# Altium PCB YingHuoCtrl.PcbDoc
Units mil, origin at the board's own origin, x right, y up, seen from the top; angles counter-clockwise.
Board outline 1575 x 1574.8 mil, 2 copper layers (Top Layer, Bottom Layer), stack 65.792 mil thick; 54 components, 62 nets, 237 pads, 64 vias.
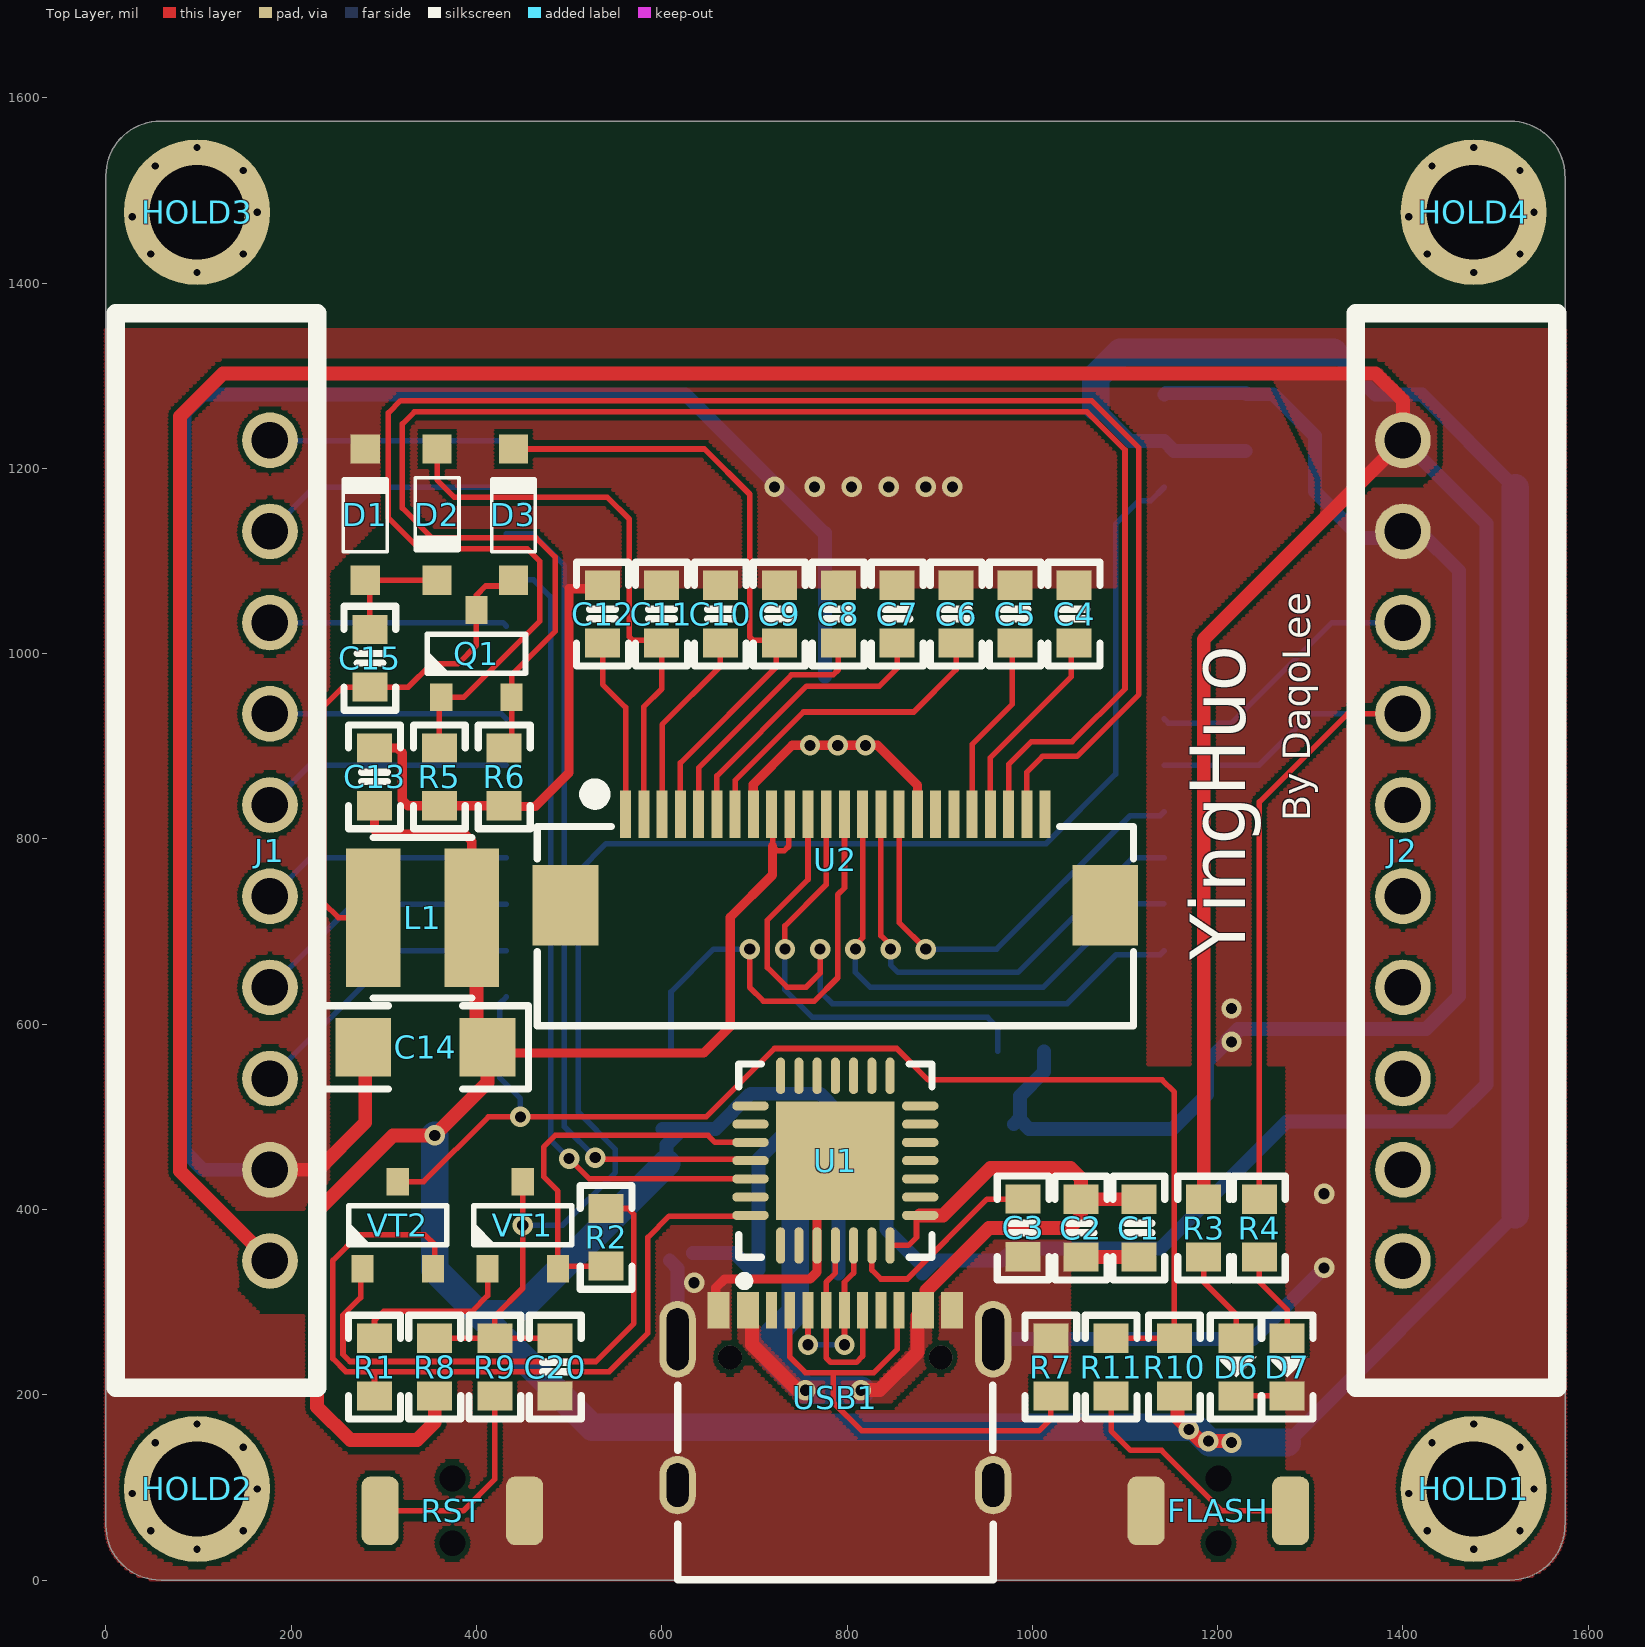
[diagram p0: Top Layer view]
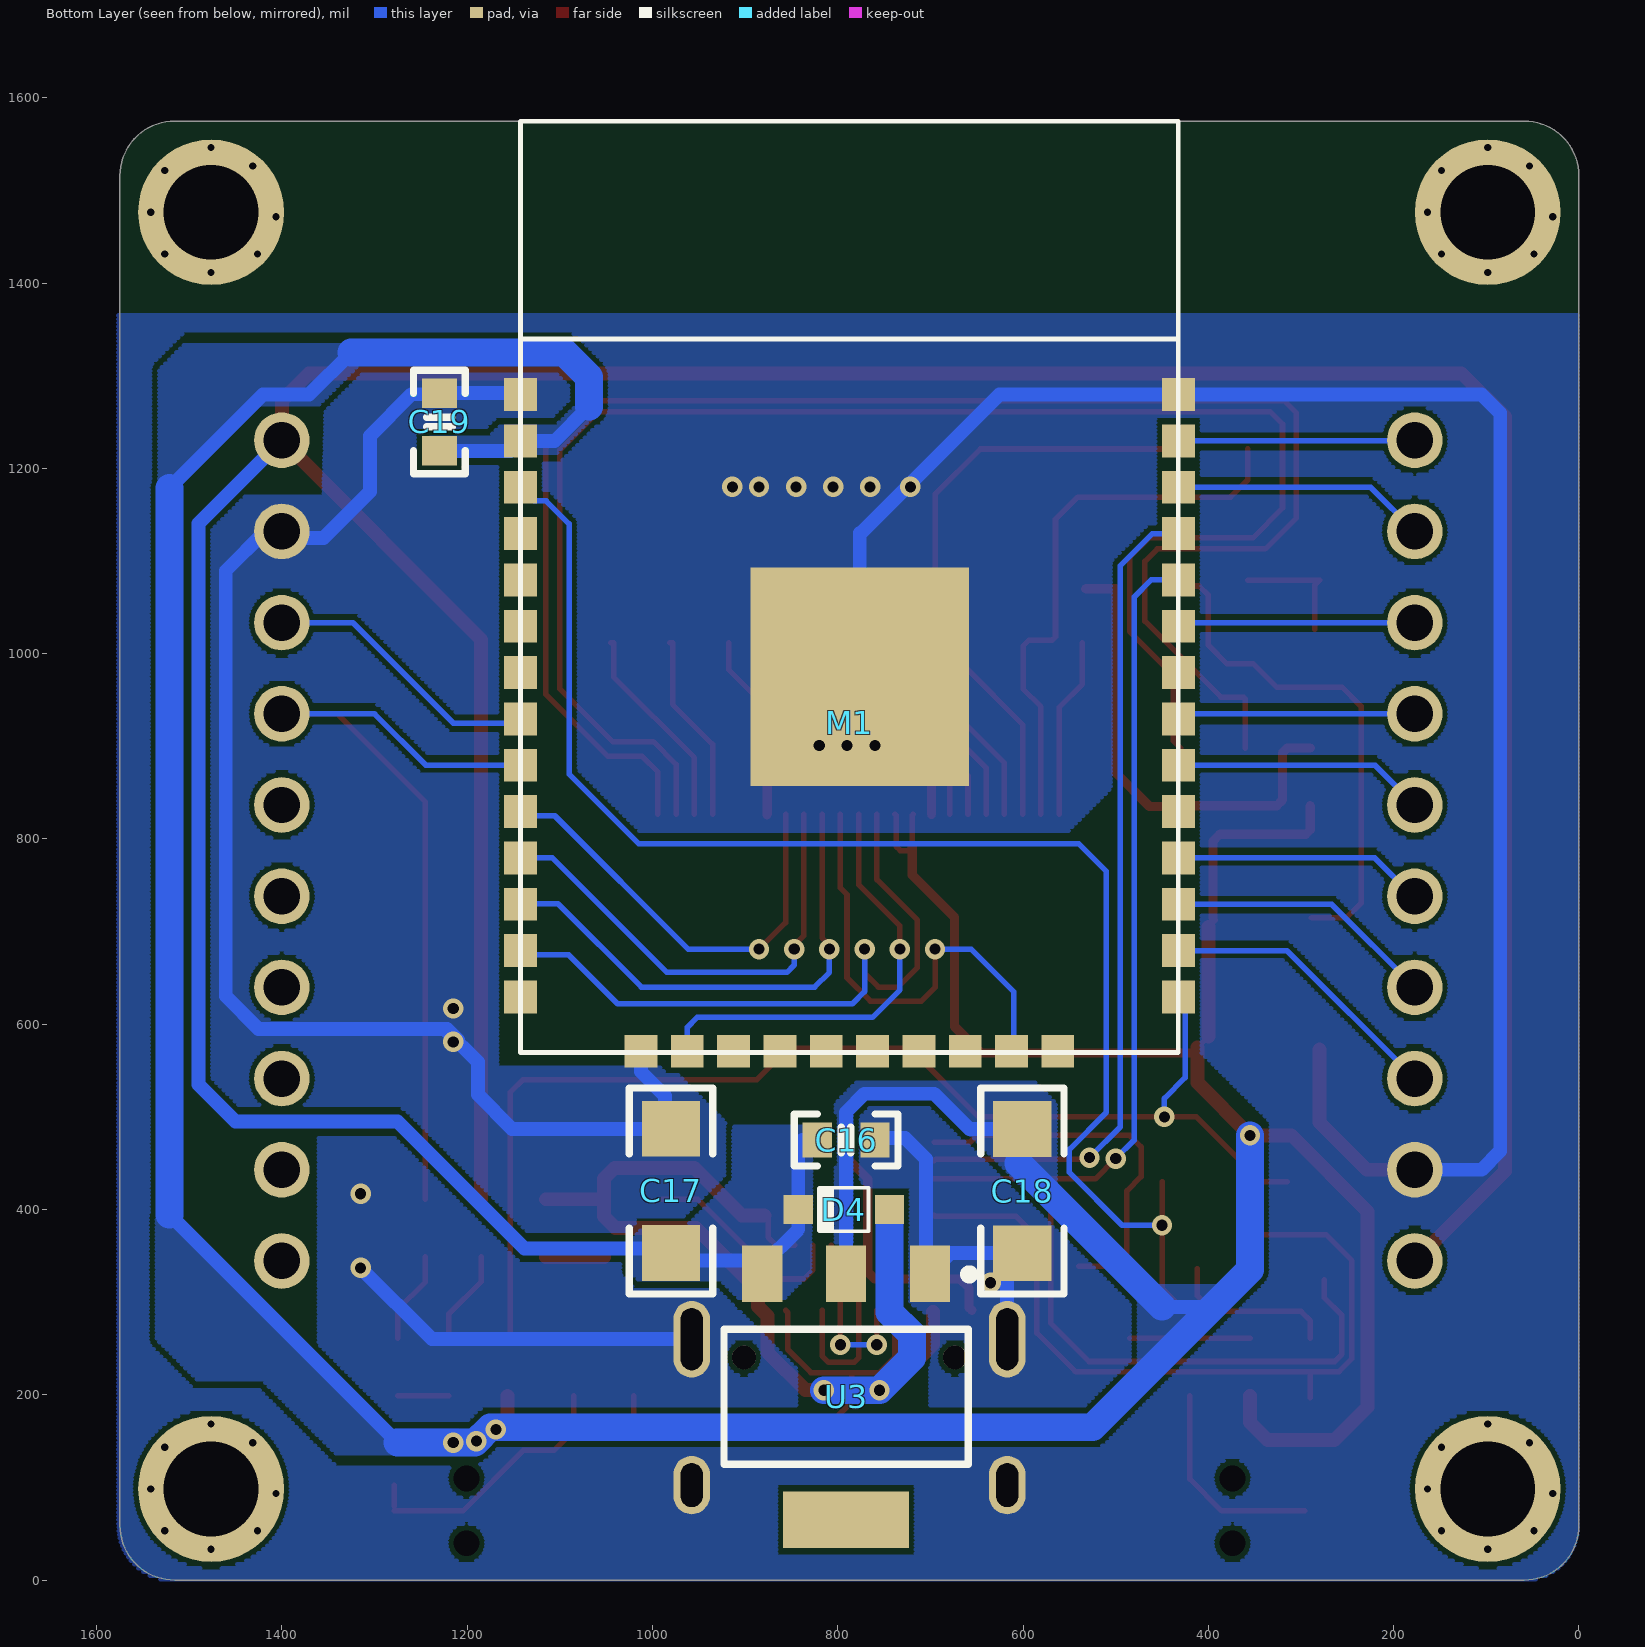
[diagram p1: Bottom Layer view, seen from below]
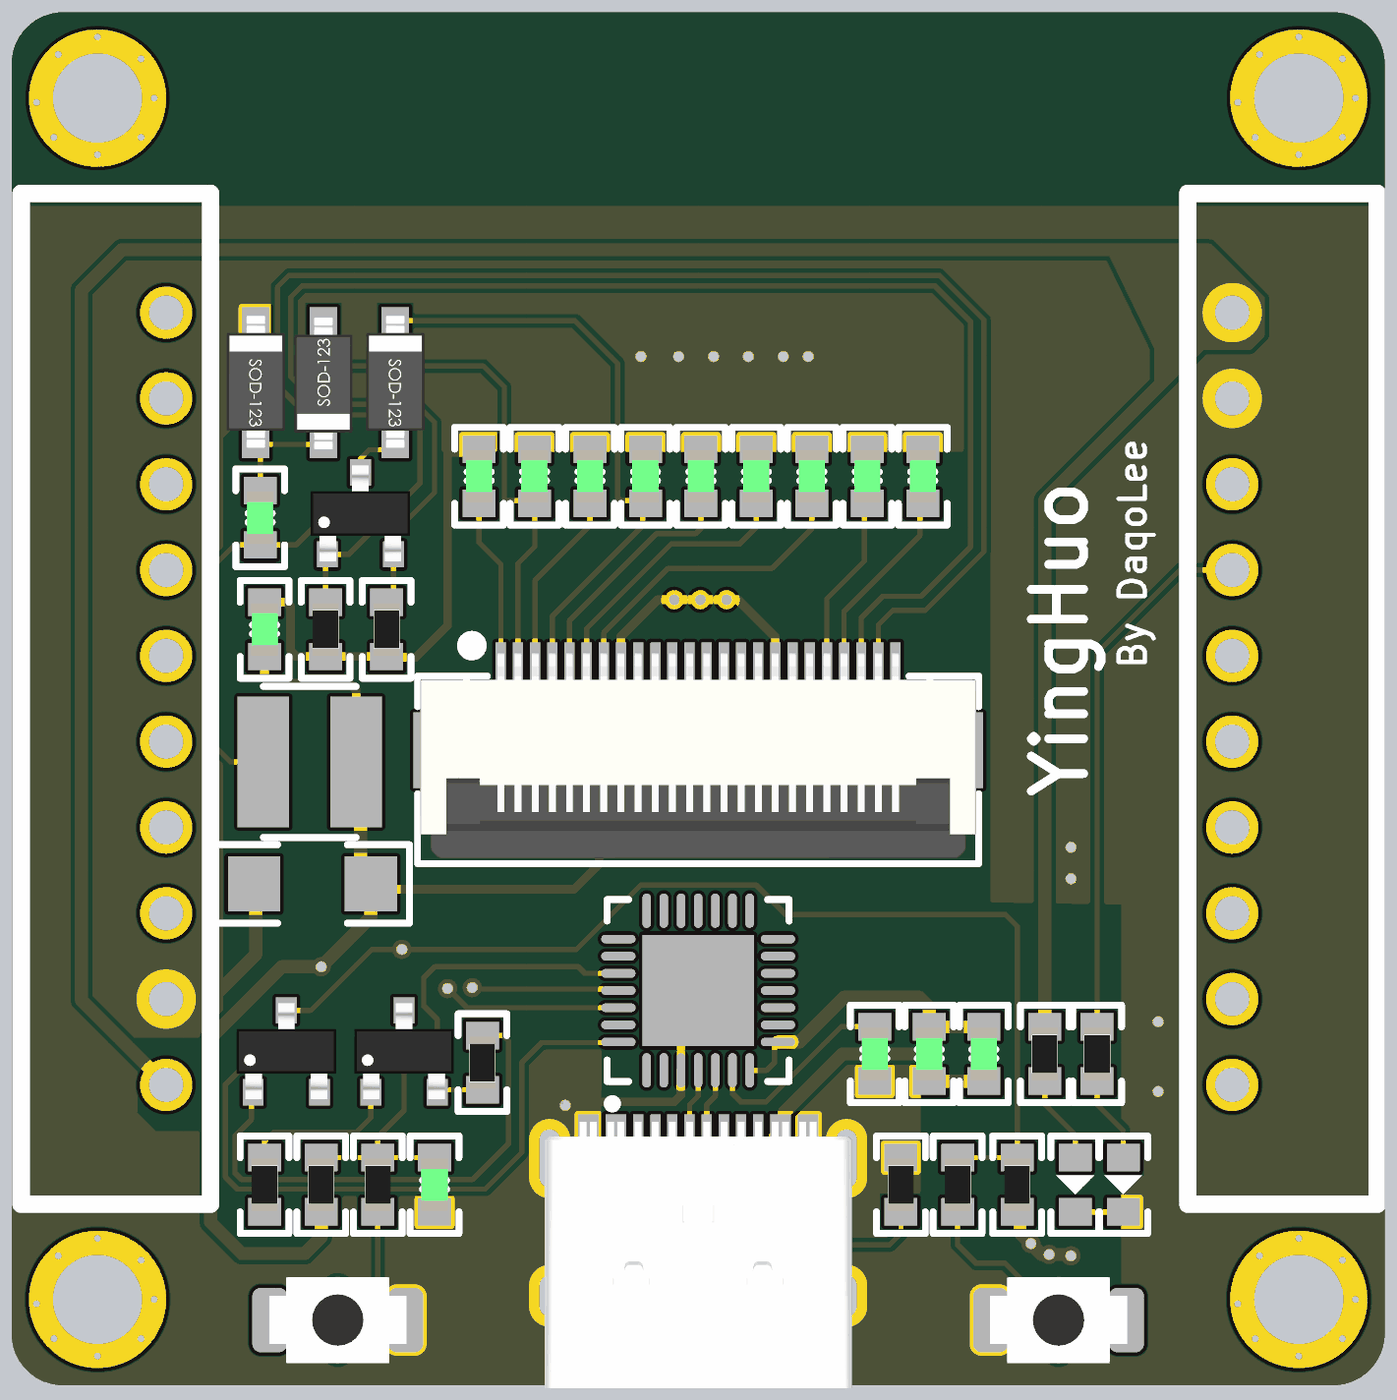
[diagram p2: 3D render of the assembled board from above, using the file's embedded part models]
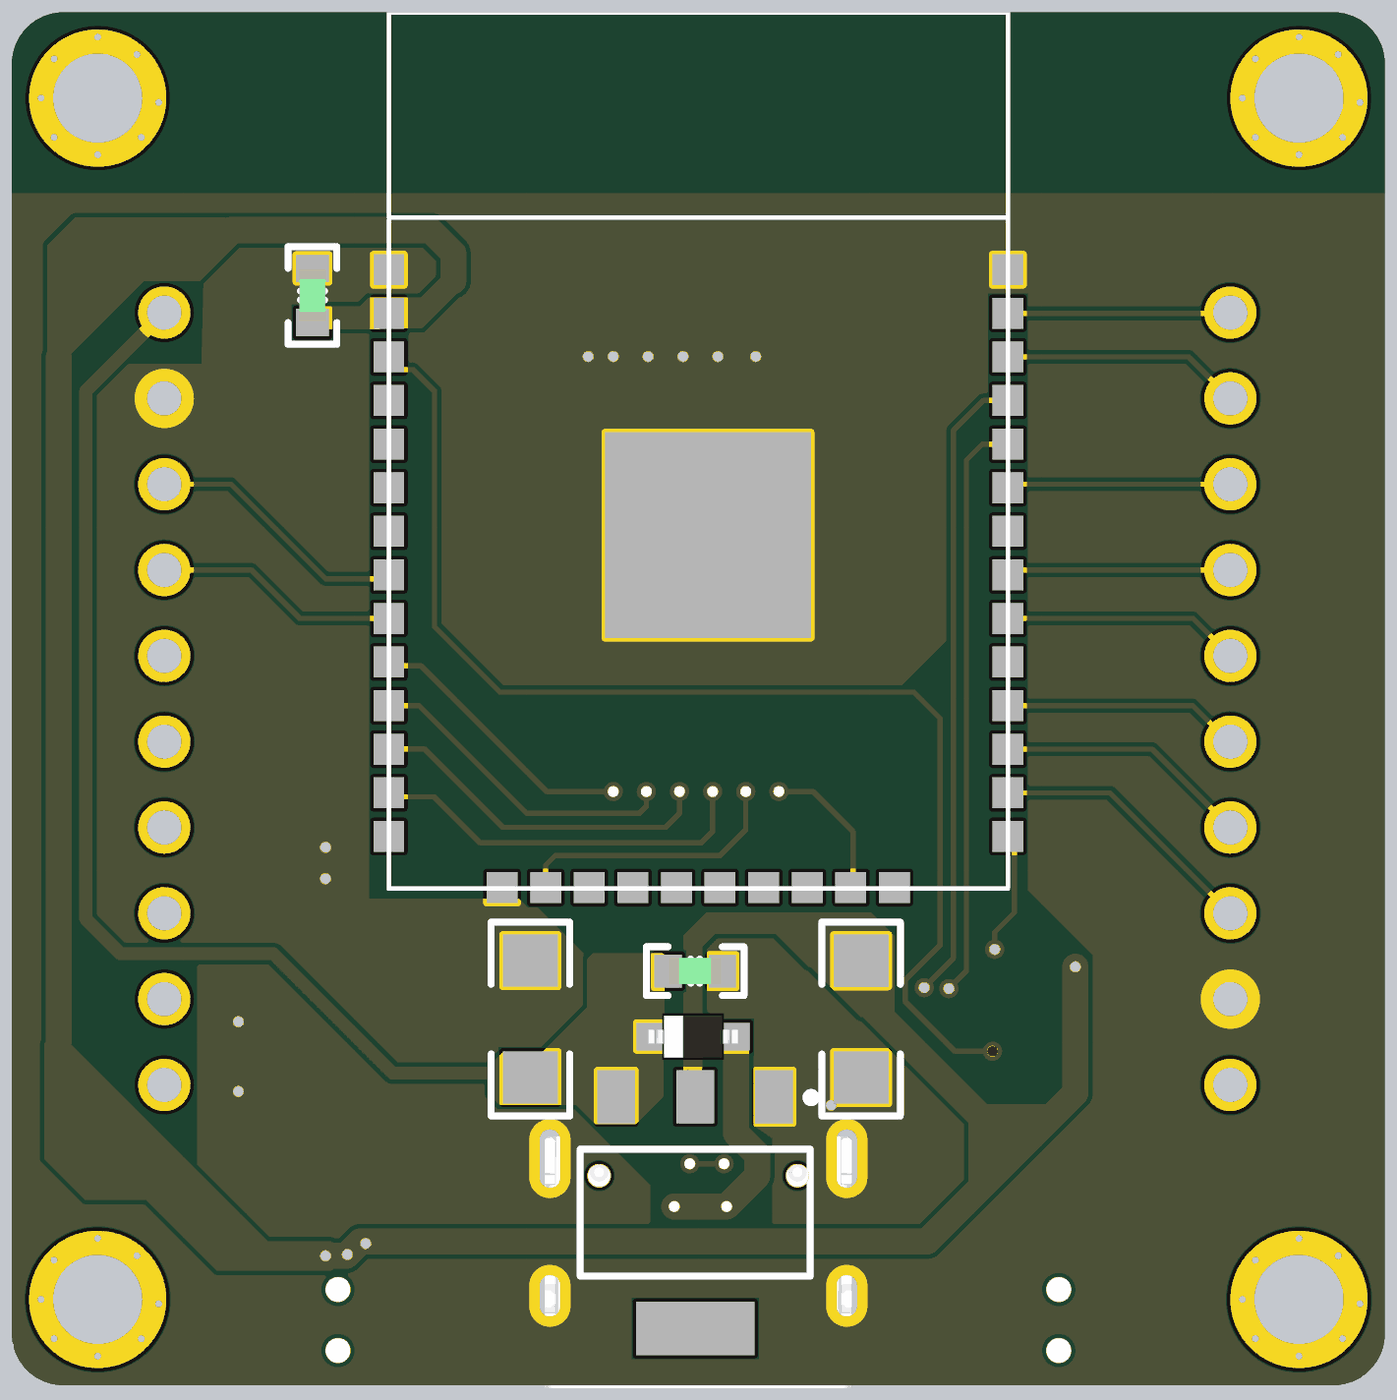
[diagram p3: 3D render of the assembled board from below, using the file's embedded part models]

## Layer stack, top to bottom
Top Solder: solder mask 0.4, Solder Resist, Dk 3.5
Top Layer: signal copper 1.4
Dielectric 1: dielectric 62.9921, FR-4, Dk 4.8
Bottom Layer: signal copper 1.4
Bottom Solder: solder mask 0.4, Solder Resist, Dk 3.5

## Board outline
0,59.06 0,1515.75 cw(c59.06,1515.75) 59.06,1574.8 1515.75,1574.8 cw(c1515.75,1515.75) 1574.8,1515.75 1575,1515 1575,59.25 1574.8,59.06 cw(c1515.75,59.06) 1515.75,0 59.06,0 cw(c59.06,59.06)

## Design rules (kind name [scope] priority, off if disabled: settings)
Clearance [All] p1: gap=5 ignorepadtopadclearanceinfootprint=FALSE
PlaneClearance [All] p1: clearance=5
PlaneConnect [All] p1: planeconnectstyle=Direct reliefexpansion=20 reliefentries=4 reliefconductorwidth=10 reliefairgap=10
PolygonConnect [All] p1: connectstyle=Direct reliefconductorwidth=10 reliefentries=4 polygonreliefangle="90 Angle" airgapwidth=10
RoutingVias [All] p1: holewidth=12 width=22 viastyle="Through Hole" minholewidth=12 minwidth=22 maxholewidth=12 maxwidth=22
SilkToSolderMaskClearance [IsPad] p1: minsilkscreentomaskgap=2 clearancetoexposedcopper=TRUE
SolderMaskExpansion [All] p1: expansion=4
Width Width_1 [InNetClass('PWR')] p1: maxlimit=15 minlimit=15 preferedwidth=15
Width [All] p2: maxlimit=31.5 minlimit=4 preferedwidth=6
27 further rules are at their usual default settings.

## Components (designator, comment, footprint, x,y, rotation, side; value= is the part's Value field where it differs from the comment)
C1 "10uF" CAP-0603 1115,380 r90 top
C2 "104" CAP-0603 1052.5,380 r90 top
C3 "1uF" CAP-0603 990,380.12 r270 top
C4 "1uF" CAP-0603 1045,1042.64 r90 top
C5 "1uF" CAP-0603 981.39,1042.64 r90 top
C6 "1uF" CAP-0603 917.78,1042.64 r90 top
C7 "1uF" CAP-0603 854.17,1042.64 r90 top
C8 "1uF" CAP-0603 790.56,1042.64 r270 top
C9 "1uF" CAP-0603 726.94,1042.64 r270 top
C10 "1uF" CAP-0603 663.33,1042.64 r270 top
C11 "1uF" CAP-0603 599.72,1042.64 r270 top
C12 "1uF" CAP-0603 536.11,1042.64 r270 top
C13 "104" CAP-0603 290,867 r90 top
C14 "475" CAP-1206 345,575 r0 top
C15 "104" CAP-0603 285,995 r90 top
C16 "10uF" CAP-0603 791,475 r0 bottom
C17 "104" CAP-1206 980,420 r270 bottom
C18 "10uF" CAP-1206 600.71,420 r90 bottom
C19 "104" CAP-0603 1230,1250 r90 bottom
C20 "104" CAP-0603 485,230 r90 top
D1 "MBR0350" SOD_123 280,1150 r270 top
D2 "MBR0350" SOD_123 357.5,1150 r90 top
D3 "MBR0350" SOD_123 440,1150 r270 top
D4 "B5819WS" SOD_323 793.4,400 r180 bottom
D6 "LED" LED-0603 1220,230 r270 top
D7 "LED" LED-0603 1275,230 r270 top
FLASH "按键" KEY_2S 1200.79,74.8 r0 top
HOLD1 "M2.5" Hold_M2.5S 1476.38,98.43 r0 top
HOLD2 "M2.5" Hold_M2.5S 98.43,98.43 r0 top
HOLD3 "M2.5" Hold_M2.5S 98.43,1476.38 r0 top
HOLD4 "M2.5" Hold_M2.5S 1476.38,1476.38 r0 top
J1 "J" JL-B01F-10 177.17,787.4 r90 top
J2 "J" JL-B01F-10 1400,787.4 r270 top
L1 "68uH" L-SMD-3D16 395,715 r180 top
M1 "ESP32S_Module" ESP32S 787.4,925.2 r180 bottom
Q1 "Si1308EDL" SOT-23-3 400,1000 r270 top
R1 "12K" R-0603 290,230 r270 top
R2 "12K" R-0603 540,370 r90 top
R3 "1K" R-0603 1185,380 r270 top
R4 "470R" R-0603 1245,380 r270 top
R5 "10K" R-0603 360,867 r90 top
R6 "3R" R-0603 430,867 r270 top
R7 "5.1K" R-0603 1020,230 r90 top
R8 "1K" R-0603 355,230 r270 top
R9 "470" R-0603 420,230 r90 top
R10 "1K" R-0603 1153.33,230 r270 top
R11 "470" R-0603 1085,230 r90 top
RST "按键" KEY_2S 374.02,74.8 r180 top
U1 "CP2102" QFN50P500X500X80_HS-29N 787.4,452.76 r90 top value=Value
U2 "PFC24" "FPC0.5 2H-WS-24P" 787.4,728.35 r0 top
U3 "LM1117-3.3V" SOT-223 815,205 r0 bottom
USB1 "Type-C" Type-C 787.4,196.85 r270 top
VT1 "S8050" SOT-23-3 450,383.06 r270 top
VT2 "S8050" SOT-23-3 315,383.06 r270 top

## Footprints (in the part's own frame and the unit in brackets; to place one, negate y for a bottom-side part, rotate by r counter-clockwise, add the part's x,y. Pads: shape width x height; smd on the part's side, far side on the other; paste and mask are expansions set on the pad)
CAP-0603 [mm]
  rect 0.8x0.96 smd: 1(-0.79,0) 2(0.79,0)
  silkscreen extent -1.42,-0.71 1.42,0.71, body extent -0.76,-0.39 0.76,0.39, height 0.9
CAP-1206 [mm] "贴片元件"
  rect 1.524x1.6 smd: 1(-1.703,0) 2(1.7,0)
  silkscreen extent -2.83,-1.14 2.83,1.14, body extent -1.91,-0.89 1.91,0.89, height 1
ESP32S [mm] "ESP32S-Module"
  rect 0.9x0.9 smd: 1(-9.017,9) 2(-9.017,7.73) 3(-9.017,6.46) 4(-9.017,5.19) 5(-9.017,3.92) 6(-9.017,2.65) 7(-9.017,1.38) 8(-9.017,0.11) 9(-9.017,-1.16) 10(-9.017,-2.43) 11(-9.017,-3.7) 12(-9.017,-4.97) 13(-9.017,-6.24) 14(-9.017,-7.51) 15(-5.717,-9) 16(-4.447,-9) 17(-3.177,-9) 18(-1.907,-9) 19(-0.637,-9) 20(0.633,-9) 21(1.903,-9) 22(3.173,-9) 23(4.443,-9) 24(5.713,-9) 25(9.017,-7.51) 26(9.017,-6.24) 27(9.017,-4.97) 28(9.017,-3.7) 29(9.017,-2.43) 30(9.017,-1.16) 31(9.017,0.11) 32(9.017,1.38) 33(9.017,2.65) 34(9.017,3.92) 35(9.017,5.19) 36(9.017,6.46) 37(9.017,7.73) 38(9.017,9)
  rect 6x6 smd: 101(0.283,1.266)
  silkscreen extent -9.02,-9.03 9.02,16.49, body extent -9.02,-9.03 9.02,16.49, height 2
"FPC0.5 2H-WS-24P" [mm] "长：16.2mm，宽：5.2mm，高：2mm"
  rect 1.8x2.2 smd: 0(-7.4,0) 0(7.4,0)
  rect 0.3x1.3 smd: 1(5.75,2.497) 2(5.25,2.497) 3(4.75,2.497) 4(4.25,2.497) 5(3.75,2.497) 6(3.25,2.497) 7(2.75,2.497) 8(2.25,2.497) 9(1.75,2.497) 10(1.25,2.497) 11(0.75,2.497) 12(0.25,2.497) 13(-0.25,2.497) 14(-0.75,2.497) 15(-1.25,2.497) 16(-1.75,2.497) 17(-2.25,2.497) 18(-2.75,2.497) 19(-3.25,2.497) 20(-3.75,2.497) 21(-4.25,2.497) 22(-4.75,2.497) 23(-5.25,2.497) 24(-5.75,2.497)
  silkscreen extent -8.18,-3.3 8.18,3.23, body extent -8.1,-3.15 8.1,2.85, height 2
Hold_M2.5S [mm]
  round 4 hole 2.6: 0(0,0)
JL-B01F-10 [mil]
  round 60 hole 39.37: 1(-442.91,0) 2(-344.49,0) 3(-246.06,0) 4(-147.64,0) 5(-49.21,0) 6(49.21,0) 7(147.64,0) 8(246.06,0) 9(344.49,0) 10(442.91,0)
  silkscreen extent -580,-51 580,166, body extent -522,-6 522,250, height 216
KEY_2S [mil]
  round 0 hole 28: 0(0,-35) 0(0,35)
  rrect50% 40x74 smd: 1(-78,0) 2(78,0)
  body extent -79,-49 79,49, height 63
L-SMD-3D16 [mm] "贴片电感4x4"
  rect 1.5x3.8 smd: 1(0,0) 2(2.7,0)
  silkscreen extent 0,-2.2 2.7,2.2, body extent -0.5,-1.85 3.2,1.85, height 2
LED-0603 [mm]
  rect 0.8x0.96 smd: 1(-0.79,0) 2(0.79,0)
  silkscreen extent -1.42,-0.71 1.42,0.71, body extent -0.81,-0.4 0.81,0.4, height 0.6
QFN50P500X500X80_HS-29N [mm] "QFN, 28-Leads, Body 5.00x5.00mm, Pitch 0.50mm, Thermal Pad 3.25x3.25mm, IPC Medium Density"
  oval 1x0.25 smd: 1(-2.325,1.5) 2(-2.325,1) 3(-2.325,0.5) 4(-2.325,0) 5(-2.325,-0.5) 6(-2.325,-1) 7(-2.325,-1.5) 15(2.325,-1.5) 16(2.325,-1) 17(2.325,-0.5) 18(2.325,0) 19(2.325,0.5) 20(2.325,1) 21(2.325,1.5)
  oval 0.25x1 smd: 8(-1.5,-2.325) 9(-1,-2.325) 10(-0.5,-2.325) 11(0,-2.325) 12(0.5,-2.325) 13(1,-2.325) 14(1.5,-2.325) 22(1.5,2.325) 23(1,2.325) 24(0.5,2.325) 25(0,2.325) 26(-0.5,2.325) 27(-1,2.325) 28(-1.5,2.325)
  rect 3.25x3.25 smd: 29(0,0)
  silkscreen extent -3.42,-2.65 2.65,2.65, body extent -2.5,-2.5 2.5,2.5, height 0.8
R-0603 [mm]
  rect 0.8x0.96 smd: 1(-0.79,0) 2(0.79,0)
  silkscreen extent -1.42,-0.71 1.42,0.71, body extent -0.76,-0.38 0.76,0.38, height 0.41
SOD_123 [mm]
  rect 0.8x0.8 smd: 1(1.8,0) 2(-1.8,0)
  silkscreen extent -1.02,-0.6 1.02,0.6, body extent -1.95,-0.85 1.9,0.85, height 1.42
SOD_323 [mm]
  rect 0.8x0.8 smd: 1(1.25,0) 2(-1.25,0)
  silkscreen extent -0.72,-0.6 0.67,0.6, body extent -1.3,-0.68 1.3,0.67, height 1.1
SOT-23-3 [mil] "贴片MOS管"
  rect 30x24 smd: 1(47,-38) 2(47,38) 3(-47,0)
  silkscreen extent -21,-53 21,53, body extent -55,-57 55,57, height 51
SOT-223 [mm]
  rect 1.1x1.55 smd: 1(-2.91,-3.197) 2(-0.61,-3.197) 3(1.69,-3.197)
  rect 3.45x1.55 smd: 4(-0.61,3.553)
  silkscreen extent -4.11,-3.3 2.74,2.03, body extent -3.88,-3.38 2.62,3.58, height 1.7
Type-C [mm]
  round 0.65 hole 0.65: 0(-1.105,2.89) 0(-1.105,-2.89)
  oval 1.6x1 hole 0.6 slot 1.2 at 0 deg: 1(2.395,4.325) 2(2.395,-4.325)
  oval 2.1x1 hole 0.6 slot 1.7 at 0 deg: 3(-1.605,-4.325) 4(-1.605,4.325)
  rect 1x0.3 smd: A1(-2.395,-3.35) A4(-2.395,-2.55) A5(-2.395,-1.25) A6(-2.395,-0.25) A7(-2.395,0.25) A8(-2.395,1.25) A9(-2.395,2.55) A12(-2.395,3.35) B1(-2.395,3.05) B4(-2.395,2.25) B5(-2.395,1.75) B6(-2.395,0.75) B7(-2.395,-0.75) B8(-2.395,-1.75) B9(-2.395,-2.25) B12(-2.395,-3.05)
  silkscreen extent -0.34,-4.33 4.99,4.33, body extent -2.67,-4.48 5.08,4.48, height 3.26

## Part data
C1 C2 C3 C4 C5 C6 C7 C8 C9 C10 C11 C12 C13 C14 C15 C16 C17 C18 C19 C20: library part CAP
D1 D2 D3 D4: library part TVS
HOLD1 HOLD2 HOLD3 HOLD4: library part Hold_M3
J1 J2: library part HDR1x10
L1: library part Inductor, "电感"
M1: "Esp-32S", Datasheet=https://espressif.com/sites/default/files/documentation/esp_wroom_32_datasheet_en.pdf
Q1: library part MOS-N
R1 R2 R3 R4 R5 R6 R7 R8 R9 R10 R11: library part Res
U1: "Imported", MFG #1="SILICON LABS", PART DESC="SINGLE-CHIP USB TO UART BRIDGE, QFN28, RoHS.", PART NUMBER=CP2102, RefDes=RefDes, Type=DEV
VT1 VT2: library part BJT_NPN, "Transistor"

## Via types
v1: diameter 15.75, hole 7.87, Top Layer to Bottom Layer, tented both sides, 32 vias
v2: diameter 22, hole 12, Top Layer to Bottom Layer, tented both sides, 29 vias
v3: diameter 22, hole 12, Top Layer to Bottom Layer, 3 vias

## Nets (pads, with @x,y where several pads share a name; then routed paths per layer and width w, separated by ;. In a path a pad name is that pad's centre, name@x,y a point inside that pad or via, vN(x,y) a via of type N, cw(c..) or ccw(c..) an arc to the next point about the centre after c; other vN are vias at no path point)
3V3: C13.1 C14.2 C18.2 C19.1 L1.1 M1.2 R8.2 R10.2 U2.15 U2.16 U3.2 | length 5424.6
  Top Layer w6: L1.1@392.5,712.5 L1.1@400,705 ; C14.2@400,586.93 C14.2 ; U2.16 719.67,825.49 719.67,792.06 724.33,787.4 732.4,787.4 737.06,792.06 737.06,825.53 U2.15
  Top Layer w10: C13.1 290,810 295,805 387.6,805 395,797.6 L1.1 ; C14.2@410,569 411.93,569 645.4,569 674,597.6 674,715.46 719.67,761.13 719.67,792.06
  Top Layer w15: R8.2 355,170 336.06,151.06 263.94,151.06 228.03,186.97 228.03,398.03 310,480 v2(355,480) 411.93,536.93 411.93,569 C14.2 ; C14.2@400,586.93 L1.1@400,705 ; R10.2@1156.48,198.9 1156.48,175.06 1181.54,150 v2(1190,150) v2@1215,150
  Bottom Layer w6: v2(1169.01,162.53) 1181.54,150 v2(1190,150)
  Bottom Layer w15: 395,295 450,295 ; C18.2 C18.2@622.48,486.93 ; 605,450 605,469.45 C18.2@622.48,486.93 ; U3.2 791,505 771,525 696.03,525 657.96,486.93 C18.2@622.48,486.93 ; 1068.5,1266.5 1105.47,1229.53 M1.2 1153.03,1218.9 C19.1 ; v2(1190,150) v2@1191.57,148.43 ; 1275.17,148.43 1521.14,394.39 ; 1325,1325 1370.47,1279.53 1420.47,1279.53 1521.14,1178.86
  Bottom Layer w30: v2(355,480) 355,335 395,295 525,165 v2@1169.01,165 ; 450,295 605,450 ; 1068.5,1266.5 1068.5,1298.5 1095,1325 1325,1325 ; v2@1191.57,148.43 v2(1215,148.43) 1275.17,148.43 ; 1521.14,394.39 1521.14,1178.86
#EN: C20.2 M1.3 R8.1 R9.2 VT1.3 | length 1738.8
  Top Layer w6: R8.1 R9.2 ; VT1.3 v2(450,383.06) 450,315 420,285 R9.2 ; C20.2 R9.2
  Bottom Layer w6: v2(450,383.06) 493.06,383.06 550,440 550,465 510,505 510,765 540,795 1015,795 1090,870 1090,1140 1114.81,1164.81 1127.69,1164.81 M1.3
CC: R7.1 USB1.A5 USB1.B5 | length 536.7
  Top Layer w6: USB1.A5 738.19,240.81 755,224 785,224 ; USB1.B5 854,288.84 854,249 829,224 785,224 ; R7.1 1020,174 1007,161 816,161 785,192 785,224
CLK: M1.20
CMD: M1.19
DTR: R1.2 U1.28 VT2.2 | length 876.8
  Top Layer w6: R1.2@290,197 R1.2 290,225 ; VT2.2@361.02,335.04 355,341.06 355,362.06 344.06,373 273.02,373 245,344.98 245,239 259,225 290,225 ; U1.28 695.1,392.9 607.9,392.9 585,370 585,266.63 543.37,225 290,225
GDR: Q1.1 R5.2 U2.2 | length 1860.8
  Top Layer w6: R5.2 360,951 Q1.1 386.49,953 468.5,1035.01 468.5,1099.5 455,1113 338.36,1113 305,1146.36 305,1259.85 318.15,1273 1064,1273 1115,1222 1115,956 1048,889 1011,889 994.09,872.09 U2.2
GND: C1.1 C2.1 C3.2 C4.2 C5.2 C6.2 C7.2 C8.1 C9.1 C10.1 C11.1 C12.1 C13.2 C14.1 C16.1 C17.1 C18.1 C19.2 C20.1 D1.2 D6.2 D7.2 FLASH.1 J1.2 J2.2 M1.1 M1.15 M1.38 M1.101 R5.1 R6.2 R7.2 RST.1 U1.3 U1.29 U2.8 U2.17 U3.1 USB1.1 USB1.2 USB1.3 USB1.4 USB1.A1 USB1.A12 USB1.B1 USB1.B12 | length 5547.1
  Top Layer w6: C14.1 C14.1@280,572.95 ; D6.2 D7.2
  Top Layer w10: C13.2 314.9,898.1 320,893 320,842 326.1,835.9 R5.1 R6.2 430.9,835 463.5,835 500,871.5 500,1070 C12.1@532.37,1070 ; USB1.A1 658.42,294.05 658.42,315.42 668,325 760,325 767.54,332.54 767.54,361.04 U1.3 767.72,433.07 U1.29 ; U2.17 698.82,858.82 741,901 v3(760,901) v3(790,901) v3(820,901) 832.83,901 875.98,857.85 U2.8 U2.8@876.49,826.15
  Top Layer w15: J1.2 228.91,442.91 280,494 C14.1@280,572.95 ; C2.1 C1.1
  Bottom Layer w15: J1.2 105.09,442.91 85,463 85,1259.53 105,1279.53 M1.38 625.55,1279.53 775,1130.08 776.26,1130.08 M1.101 ; C18.1@608.66,345 617.13,336.54 USB1.3 ; USB1.2@617.13,96.37 USB1.2 ; 633.54,352.95 678.37,352.95 U3.1 704.64,335.06 704.64,454.43 727.21,477 C16.1@755,477 ; USB1.4@966.56,268.92 USB1.4 957.68,256.26 968.93,245 968.93,260.04 1238.04,260.04 v2(1315,337) ; C17.1@980,492.05 985,497.05 C17.1@986.5,497.05 ; M1.15 1012.48,548.7 986.5,522.72 C17.1@986.5,497.05 ; M1.1 1143.98,1281.1 C19.2 1231.1,1280 1260,1280 1305,1235 1305,1175 1355,1125 1393.11,1125 J2.2 1418.11,1131.89 1460.55,1089.45 1460.55,630.55 1425,595 1221.96,595 ; v2@1210,581 1210,583.04 1221.96,595 ; C17.1@986.5,497.05 996.5,487.05 1151.5,487.05 1188.5,524.05 1188.5,559.17 1223.15,593.81 1221.96,595
  other v2: 635,321 1315,417 1215,581 1215,617 721.67,1180 765,1180 805,1180 845,1180 885,1180 913.7,1180
IO0: M1.25 R10.1 R11.2 VT2.3 | length 1393.2
  Top Layer w6: VT2.3 343.06,430.06 413,500 v2(447.49,500) 647.91,500 721.73,573.82 853.66,573.82 887.48,540 1140,540 1153.33,526.67 R10.1 R11.2
  Bottom Layer w6: M1.25 425,622.13 425,542.33 447.49,519.84 v2(447.49,500)
IO2: M1.24
IO4: J1.3 M1.26 | length 312.5
  Bottom Layer w6: J1.3 315.35,679.53 M1.26
IO5: M1.29
IO12: M1.14
IO13: M1.16 U2.13 | length 480.1
  Top Layer w6: v2(733,681) 733,706.19 777.56,750.75 U2.13
  Bottom Layer w6: v2(733,681) 733,637 762.59,607.41 951.76,607.41 962.48,596.68 M1.16
IO14: M1.13 U2.14 | length 728.1
  Top Layer w6: U2.14 757.87,756.22 714,712.35 714,661 735,640 756,640 771,655 v2(771,681)
  Bottom Layer w6: v2(771,681) 771,635.31 784.19,622.13 1037.6,622.13 1090.47,675 1137.87,675 M1.13
IO15: M1.23 U2.12 | length 501.5
  Top Layer w6: v2(695,681) 695,639.76 709.76,625 764.82,625 790,650.18 790,739.86 797.24,747.11 U2.12
  Bottom Layer w6: M1.23 610,573.35 610,635 656,681 v2(695,681)
IO16: J1.4 M1.27 | length 292.4
  Bottom Layer w6: J1.4 266.93,729.53 M1.27
IO17: J1.5 M1.28 | length 272.4
  Bottom Layer w6: J1.5 179.08,738.19 220.41,779.53 M1.28
IO18: J1.6 M1.30 | length 273
  Bottom Layer w6: J1.6 220.08,879.53 M1.30
IO19: J1.7 M1.31 | length 257.5
  Bottom Layer w6: J1.7 426.89,935.04 M1.31
IO21: J1.8 M1.33 | length 256.9
  Bottom Layer w6: J1.8 428.46,1033.46 M1.33
IO22: J1.9 M1.36 | length 275
  Bottom Layer w6: J1.9 224.8,1179.53 M1.36
IO23: J1.10 M1.37 | length 255.6
  Bottom Layer w6: J1.10 177.95,1229.53 M1.37
IO25: M1.10 U2.9 | length 476.5
  Top Layer w6: U2.9 856.3,709.7 v2(885,681)
  Bottom Layer w6: v2(885,681) 961.47,681 1105.47,825 1137.87,825 M1.10
IO26: M1.11 U2.10 | length 516.8
  Top Layer w6: U2.10 836.61,695.72 847,685.33 v2(847,681)
  Bottom Layer w6: v2(847,681) 847,664 855,656 984.5,656 1108.02,779.53 M1.11
IO27: M1.12 U2.11 | length 550.8
  Top Layer w6: v2(809,681) 809,685.33 816.93,693.26 U2.11
  Bottom Layer w6: v2(809,681) 809,656 825,640 1011.94,640 1101.94,730 M1.12@1141.93,730
IO32: J2.3 M1.8 | length 304.4
  Bottom Layer w6: M1.8 1146.93,925 1215,925 1323.46,1033.46 J2.3
IO33: J2.4 M1.9 R4.1 | length 903.9
  Top Layer w6: R4.1 1245,840 1340.04,935.04 J2.4
  Bottom Layer w6: M1.9 1244.53,879.53 1300.04,935.04 J2.4
IO34: M1.6
IO35: M1.7
NetC3_1: C3.1 U1.6 | length 229.5
  Top Layer w6: U1.6 826.77,334.74 836.51,325 865,325 951.22,411.22 C3.1
NetC4_1: C4.1 U2.4 | length 224.1
  Top Layer w6: U2.4 954.72,887.72 1041.85,974.85 1041.85,1011.54 C4.1
NetC5_1: C5.1 U2.5 | length 205.9
  Top Layer w6: U2.5 935.04,902.04 978.24,945.24 978.24,1011.54 C5.1
NetC6_1: C6.1 U2.18 | length 353.4
  Top Layer w6: U2.18 679.13,863.13 753,937 872,937 917.78,982.78 C6.1
NetC7_1: C7.1 U2.19 | length 311.6
  Top Layer w6: U2.19 659.45,868.02 756.43,965 835,965 854.17,984.17 C7.1
NetC8_2: C8.2 U2.20 | length 273.7
  Top Layer w6: U2.20 639.76,876.76 740,977 785,977 790.56,982.56 C8.2
NetC10_2: C10.2 U2.22 | length 211
  Top Layer w6: U2.22 600.39,923.39 663.33,986.33 C10.2
NetC12_2: C12.2 U2.24 | length 195.2
  Top Layer w6: C12.2 536.11,966.89 561.02,941.98 U2.24
NetC15_1: C15.1 D3.1 L1.2 Q1.3 | length 565.3
  Top Layer w6: L1.2 251,715 235,731 235,943 255.9,963.9 C15.1 326.41,963.9 351.51,989 380,989 400,1009 Q1.3 400,1063 410,1073 433.87,1073 D3.1
NetC15_2: C15.2 D1.1 D2.2 | length 132.6
  Top Layer w6: C15.2 285,1074.13 D1.1 D2.2
NetD6_1: D6.1 R3.2 | length 102.3
  Top Layer w6: R3.2 1185,322 1220,287 D6.1
NetD7_1: D7.1 R4.2 | length 100.2
  Top Layer w6: R4.2 1245,322 1275,292 D7.1
NetFLASH_2: FLASH.2 R11.1 | length 289.7
  Top Layer w6: R11.1 1085,161.06 1106.06,140 1139.48,140 1204.67,74.8 FLASH.2 ; FLASH.2@1278.79,80 FLASH.2@1278.79,102.3
NetR1_1: R1.1 VT1.1 | length 181.1
  Top Layer w6: R1.1 290,280 300,290 395,290 412,307 VT1.1
NetR2_2: R2.2 VT2.1 | length 572.8
  Top Layer w6: VT2.1@275,324.06 275,305 256,286 256,243.56 263.56,236 528.84,236 570,277.16 570,394.83 563.72,401.1 R2.2
NetR9_1: R9.1 RST.2 | length 228
  Top Layer w6: RST.2 385.8,74.8 420,109 R9.1
PREVGH: C9.2 D3.2 U2.21 | length 694.9
  Top Layer w6: D3.2 646.13,1220.87 695,1172 695,1018 698.51,1014.49 723.99,1014.49 C9.2 723.79,1011.54 723.79,985.79 620.08,882.08 U2.21
PREVGL: C11.2 D2.1 U2.23 | length 614.1
  Top Layer w6: D2.1 357.5,1187.4 375.9,1169 541,1169 565,1145 565,1018 568.51,1014.49 593.62,1014.49 600,1008.11 600,962 580.71,942.71 U2.23
RESE: Q1.2 R6.1 U2.3 | length 1780.4
  Top Layer w6: R6.1 438,906.1 Q1.2 438,977 485,1024 485,1104.37 464.37,1125 352,1125 320,1157 320,1248 333,1261 1059,1261 1100,1220 1100,962 1043,905 999,905 974.41,880.41 U2.3
RTS: R2.1 U1.24 VT1.2 | length 422.7
  Top Layer w6: R2.1 490.83,338.9 VT1.2 488,420 472.5,435.5 472.5,467.5 485,480 650,480 657.56,472.44 U1.24
RX0: M1.34 U1.26 | length 874.7
  Top Layer w6: v2(500,455) 521.93,433.07 U1.26
  Bottom Layer w6: M1.34 461.72,1079.53 480,1061.25 480,475 v2(500,455)
SD0: M1.21
SD1: M1.22
SD2: M1.17
SD3: M1.18
SVN: M1.5
SVP: M1.4
TX0: M1.35 U1.25 | length 898.6
  Top Layer w6: v2(528.31,456.05) 529.95,454.4 694.25,454.4 U1.25
  Bottom Layer w6: M1.35 460.47,1129.53 495,1095 495,489.36 v2(528.31,456.05)
"USB D+": U1.4 USB1.A6 USB1.B6 | length 218.9
  Top Layer w6: U1.4@787.4,361.26 787.4,331.51 777.56,321.67 USB1.A6 777.56,239.85 782.41,235 810,235 816.93,241.93 USB1.B6
"USB D-": U1.5 USB1.A7 USB1.B7 | length 187.7
  Top Layer w6: v2(757.87,254.06) USB1.B7 ; v2(797.24,254.06) USB1.A7 797.24,321.67 807.09,331.51 U1.5@807.09,361.26
  Bottom Layer w6: v2(757.87,254.06) v2(797.24,254.06)
VCC: C16.2 C17.2 D4.2 J1.1 J2.1 R3.1 U3.3 | length 4857.9
  Top Layer w15: J1.1 80,441.65 80,1256 126.5,1302.5 1370.5,1302.5 1400,1273 J2.1 1185,1015.32 R3.1
  Bottom Layer w15: C16.2 838,475 842.61,470.39 D4.2 842.61,378.67 881.55,339.73 U3.3 895.7,345.03 966.96,345.03 980,358.07 1138.07,358.07 1275,495 1450,495 1490,535 1490,1140.32 J2.1
VDDUSB: C1.2 C2.2 D4.1 U1.7 U1.8 USB1.A4 USB1.A9 USB1.B4 USB1.B9 | length 1103.2
  Top Layer w6: U1.7 866.22,361.22 875,370 875,391.93 876.77,393.7 U1.8
  Top Layer w15: USB1.B9@697.22,289.55 697.22,254.44 746.67,205 v2(755,205) ; v2(815,205) 834.98,205 875.89,245.9 875.89,285.14 885.89,295.14 885.89,312.82 953.07,380 1040,380 1052.5,392.5 C2.2 ; U1.8 903.53,393.7 954.83,445 1041,445 1052.5,433.5 C2.2 ; C1.2 C2.2
  Bottom Layer w30: D4.1 744.19,289.19 720,265 720,240 v2(755,205) v2(815,205)
pads on no net: FLASH.0 HOLD1.0 HOLD2.0 HOLD3.0 HOLD4.0 J2.5 J2.6 J2.7 J2.8 J2.9 J2.10 M1.32 RST.0 U1.1 U1.2 U1.9 U1.10 U1.11 U1.12 U1.13 U1.14 U1.15 U1.16 U1.17 U1.18 U1.19 U1.20 U1.21 U1.22 U1.23 U1.27 U2.0 U2.1 U2.6 U2.7 U3.4 USB1.0 USB1.A8 USB1.B8
copper on no net: | length 38.4
  Bottom Layer w30: 1160,165 1175,165 1191.57,148.43
  other v1: 98.43,33.43 1476.38,33.43 48.43,53.43 148.43,53.43 1426.38,53.43 1526.38,53.43 28.43,93.43 1406.38,93.43 163.43,98.43 1541.38,98.43 148.43,143.43 1526.38,143.43 53.43,148.43 1431.38,148.43 98.43,168.43 1476.38,168.43 98.43,1411.38 1476.38,1411.38 48.43,1431.38 148.43,1431.38 1426.38,1431.38 1526.38,1431.38 28.43,1471.38 1406.38,1471.38 163.43,1476.38 1541.38,1476.38 148.43,1521.38 1526.38,1521.38 53.43,1526.38 1431.38,1526.38 98.43,1546.38 1476.38,1546.38

## Polygon pours and split planes (outlines as drawn)
GND on Bottom Layer "Bottom Layer-GND" (hatched Horizontal grid 4 track 5, remove dead copper, pour order 46): 1.37,58.41 1.37,1515.11 cw(c60.42,1515.11) 60.42,1574.16 1517.12,1574.16 cw(c1517.12,1515.11) 1576.17,1515.11 1576.37,1514.36 1576.37,58.61 1576.17,58.41 cw(c1517.12,58.41) 1517.12,-0.64 60.42,-0.64 cw(c60.42,58.41)
3V3 on Bottom Layer "Bottom Layer-3V3 2" (hatched Horizontal grid 4 track 5, remove dead copper, pour order 12): 565,515 590,540 777.08,540 802.22,514.86 802.22,354.33 774.64,354.33 785,364.69 785,505 770.16,519.84 695.55,519.84 600.71,425 565,425
3V3 on Bottom Layer "Bottom Layer-3V3" (hatched Horizontal grid 4 track 5, remove dead copper, pour order 36): 1314.39,1314.39 1330,1330 1330,1337 1501.71,1337 1532,1306.71 1532,1166.2 1429.2,1269 1359.79,1269
3V3 on Bottom Layer "Bottom Layer-3V3 1" (hatched Horizontal grid 4 track 5, remove dead copper, pour order 34): 1169.01,162.53 1299.49,162.53 1528.71,391.75 1535,391.75 1535,260 1490,215 1420,215 1338.86,133.86 1193.14,133.86 1190,137
VCC on Bottom Layer "Bottom Layer-VCC 1" (hatched Horizontal grid 4 track 5, remove dead copper, pour order 2): 828.51,415 828.51,493 907.73,493 912.48,488.22 912.48,432.52 965,380 1010,380 1025,365 1025,334.12 1015,324.12 926.62,324.12 904.47,301.97 860,301.97 830,331.97 830,355
no net on Bottom Layer "Bottom Layer-No Net" (hatched Horizontal grid 4 track 5, remove dead copper, pour order 42): 1500,1575
3V3 on Bottom Layer "Bottom Layer-3V3 3" (hatched Horizontal grid 4 track 5, remove dead copper, pour order 6): 1240,1215 1105,1215 1060,1260 1060,1280 1065,1285 1105,1245 1165,1245 1175,1235 1240,1235
VCC on Bottom Layer "Bottom Layer-VCC" (hatched Horizontal grid 4 track 5, remove dead copper, pour order 4): 860,361.28
3V3 on Bottom Layer "Bottom Layer-3V3 4" (hatched Horizontal grid 4 track 5, remove dead copper, pour order 0): 379.49,320 470,320 475,315 475,220 470,220 385,305
GND on Top Layer "Top Layer-GND" (hatched Horizontal grid 4 track 5, remove dead copper, pour order 48): 0,59.06 0,1515.75 cw(c59.06,1515.75) 59.06,1574.8 1515.75,1574.8 cw(c1515.75,1515.75) 1574.8,1515.75 1575,1515 1575,59.25 1574.8,59.06 cw(c1515.75,59.06) 1515.75,0 59.06,0 cw(c59.06,59.06)
VDDUSB on Top Layer "Top Layer-VDDUSB" (hatched Horizontal grid 4 track 5, remove dead copper, pour order 30): 870,250.83 870,279.25 879.11,288.37 890,277.48 890,235.52 847.48,193 747,193 683.54,256.46 683.54,275 700.08,277.36 705,272.44 705,260 750,215 834.17,215
3V3 on Top Layer "Top Layer-3V3 3" (hatched Horizontal grid 4 track 5, remove dead copper, pour order 22): 352.5,730
VCC on Top Layer "Top Layer-VCC" (hatched Horizontal grid 4 track 5, remove dead copper, pour order 14): 1312.85,1190 1312.85,1139.4 1363.45,1190 1377,1190 1420,1190 1435,1205 1435,1246.38 1374.67,1306.71 1256.13,1306.71

## Other copper
Top Layer:
  pour cut-out: 215.63,401 141.87,401 141.87,314.87 140,313 164,289 214.37,289
  pour cut-out: 1040,557.78 1040,175.65 1092.35,175.65 1191,77 1275,77 1275,553.78
  pour cut-out: 1140,550.5
  pour cut-out: 240.02,1088.02 297,1145 303.13,1145 343.24,1104.89 480.02,1105.79 480.02,436.1 435.91,392 434.91,393 240.02,393
  pour cut-out: 1046.4,729.49
  pour cut-out: 450,538.02 450,1073 1125,1073 1125,542.1
  pour cut-out: 676.37,561.85 954.83,561.85 954.83,381.76 882.07,309 673.6,309
  pour cut-out: -20,1350.27 -20,1574.8 1610,1574.8 1610,1350.27
Bottom Layer:
  pour cut-out: 1360,482.79 1360,249.09 1498.64,387.73 1498.64,522.42 1460,483.79
  pour cut-out: 1352.72,1261.93 1385.07,1261.93 1440.1,1206.9 1440.1,1169 1355,1169
  pour cut-out: 972.83,545.65 984.36,545.65 994.49,555.82 1167.62,555.82 1167.62,709 777.59,715.45 777.59,544.89 829.48,493 921.27,493 921.27,494.09
  pour cut-out: 407.18,569 332.5,494.31 332.5,345 345.92,331.58 454.09,329.09 551.82,426.82 551.82,751.75 480,750 480,1066.62 457.62,1089 407.18,1038.57
  pour cut-out: 611.8,805 555,805 491.28,868.72 491.28,686.63
  pour cut-out: 910.96,294.97 840.77,224.23 829.85,235.15 829.85,294.97
  pour cut-out: 777.57,336.85 825.12,336.85 878.93,283.04 845,249.11 845,183 702,183 700,185 700,284.52
  pour cut-out: 762.48,361.28 762.48,418.29 780,435.81 780,360.76
  pour cut-out: 781.31,361
  pour cut-out: -10,1365 1585,1365 1585,1574.8 -10,1574.8
  pour cut-out: 835,1635
  pour cut-out: 385,1573
  pour cut-out: 410,1569

## Silkscreen, mask and mechanical layers (free items; w line width, h text height)
Top Overlay:
  text "By DaqoLee" at 1300,819.29 h30 r90
  text "YingHuo" at 1230,669.29 h60 r90
Mechanical 1:
  lines w10: 0,1515 0,59.06 ccw(c59.06,59.06) 59.06,0 ; 0,1515.75 cw(c59.06,1515.75) 59.06,1574.8 1515.75,1574.8 cw(c1515.75,1515.75) 1574.8,1515.75 ; 60,0 1515.75,0 ccw(c1515.75,59.06) 1574.8,59.06 ; 1575,59.25 1575,1515